# EAGLE board axiom_beta_interface_dummy_v0.7.1206e420 (EAGLE 7.0.0), part 1 of 2
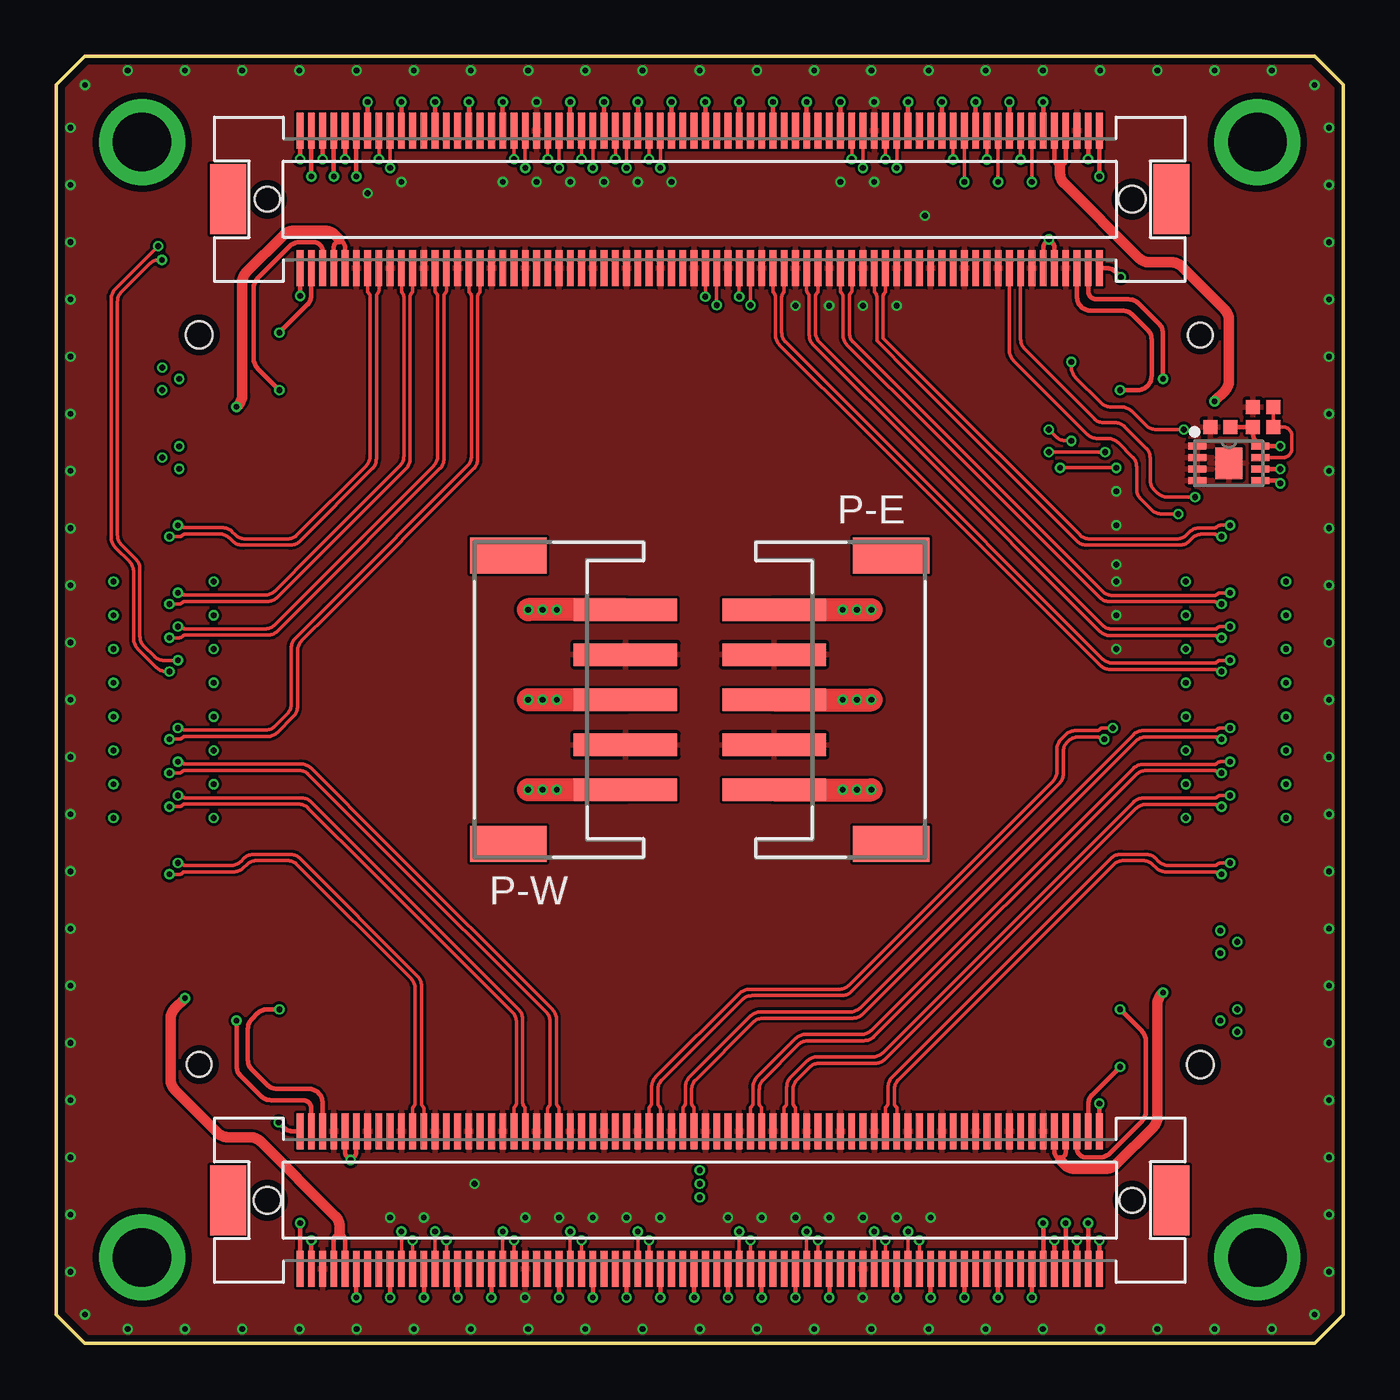
[diagram p0: board, top side]
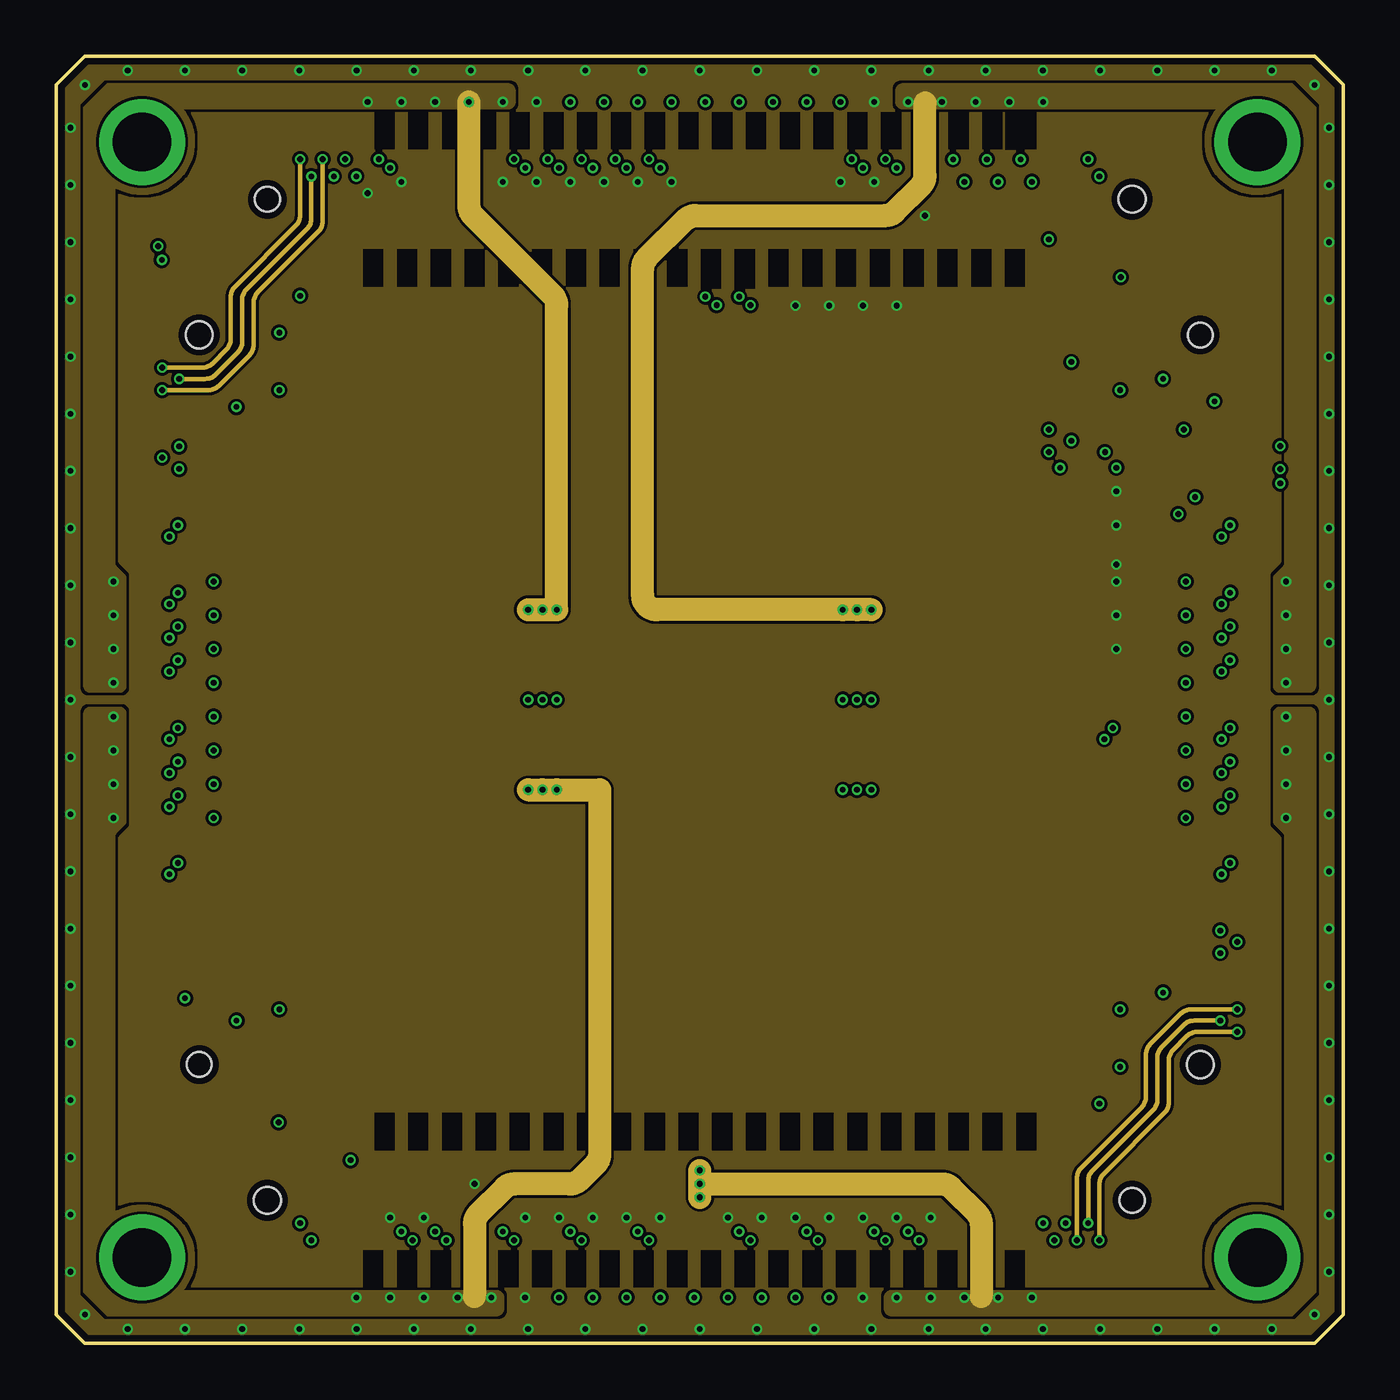
[diagram p1: board, inner layer Route2]
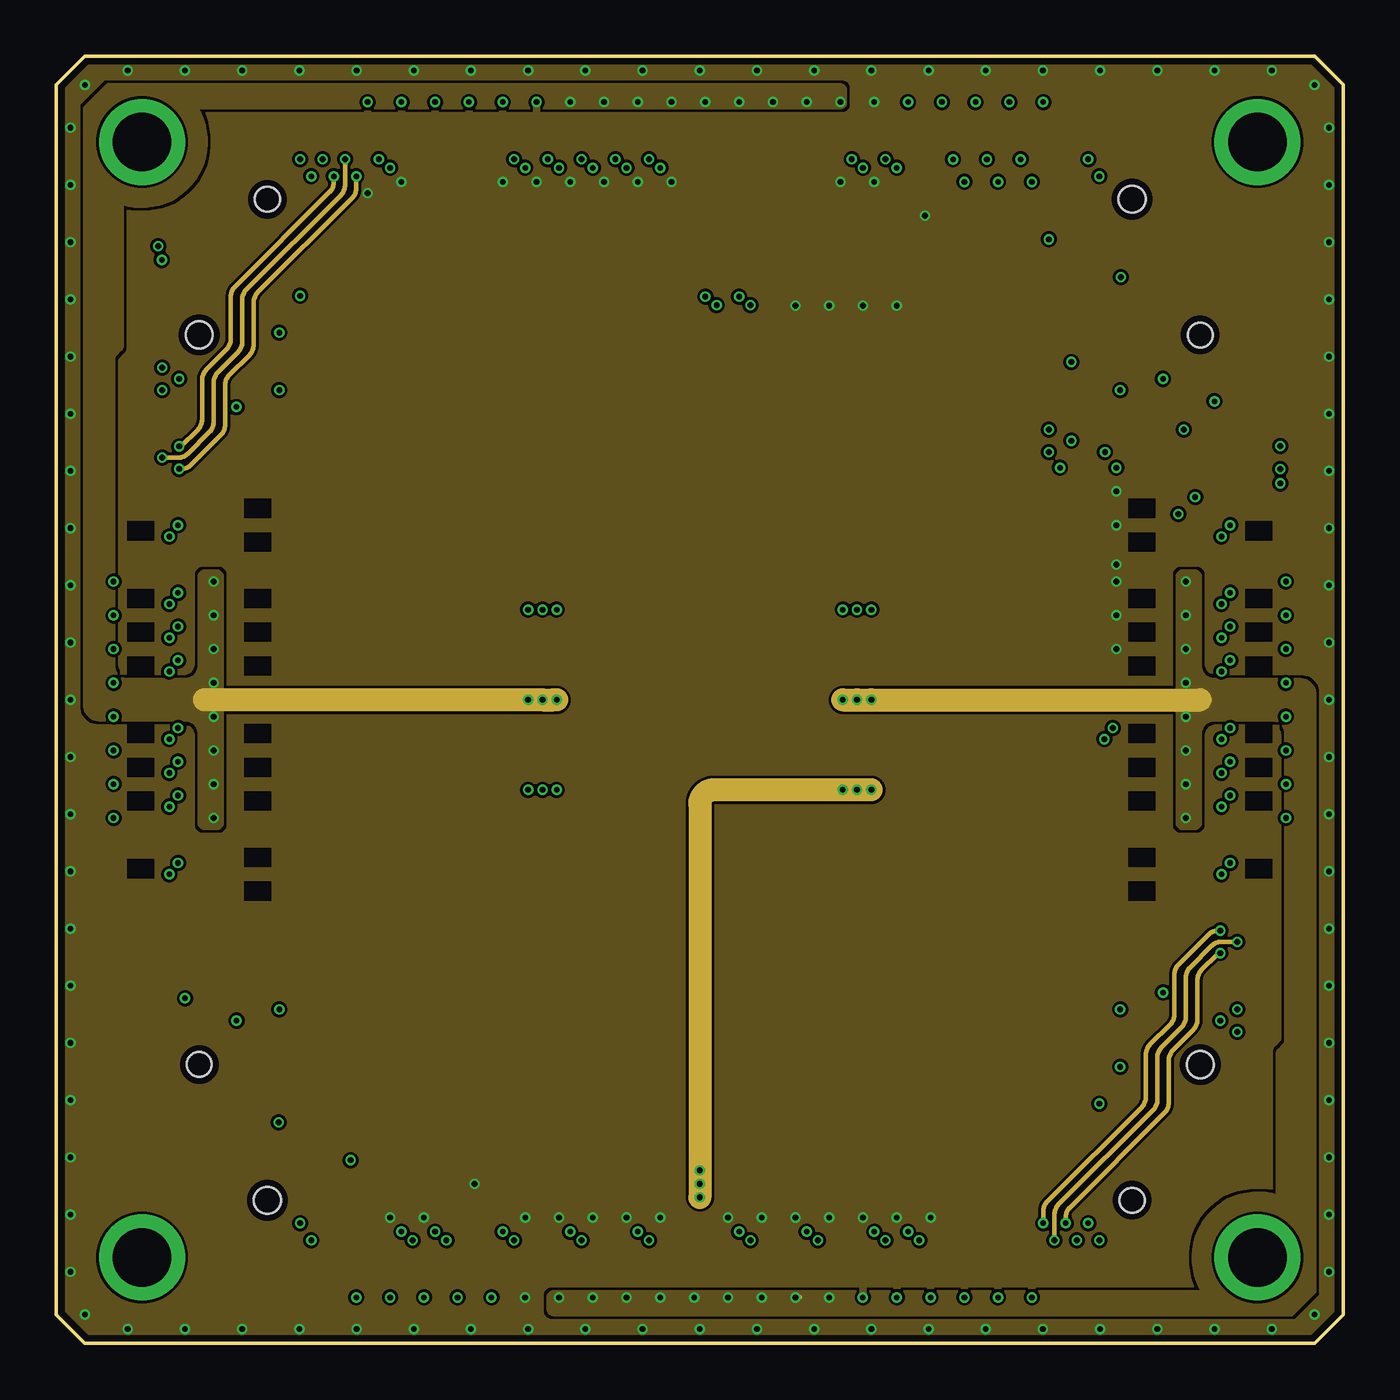
[diagram p2: board, inner layer Route15]
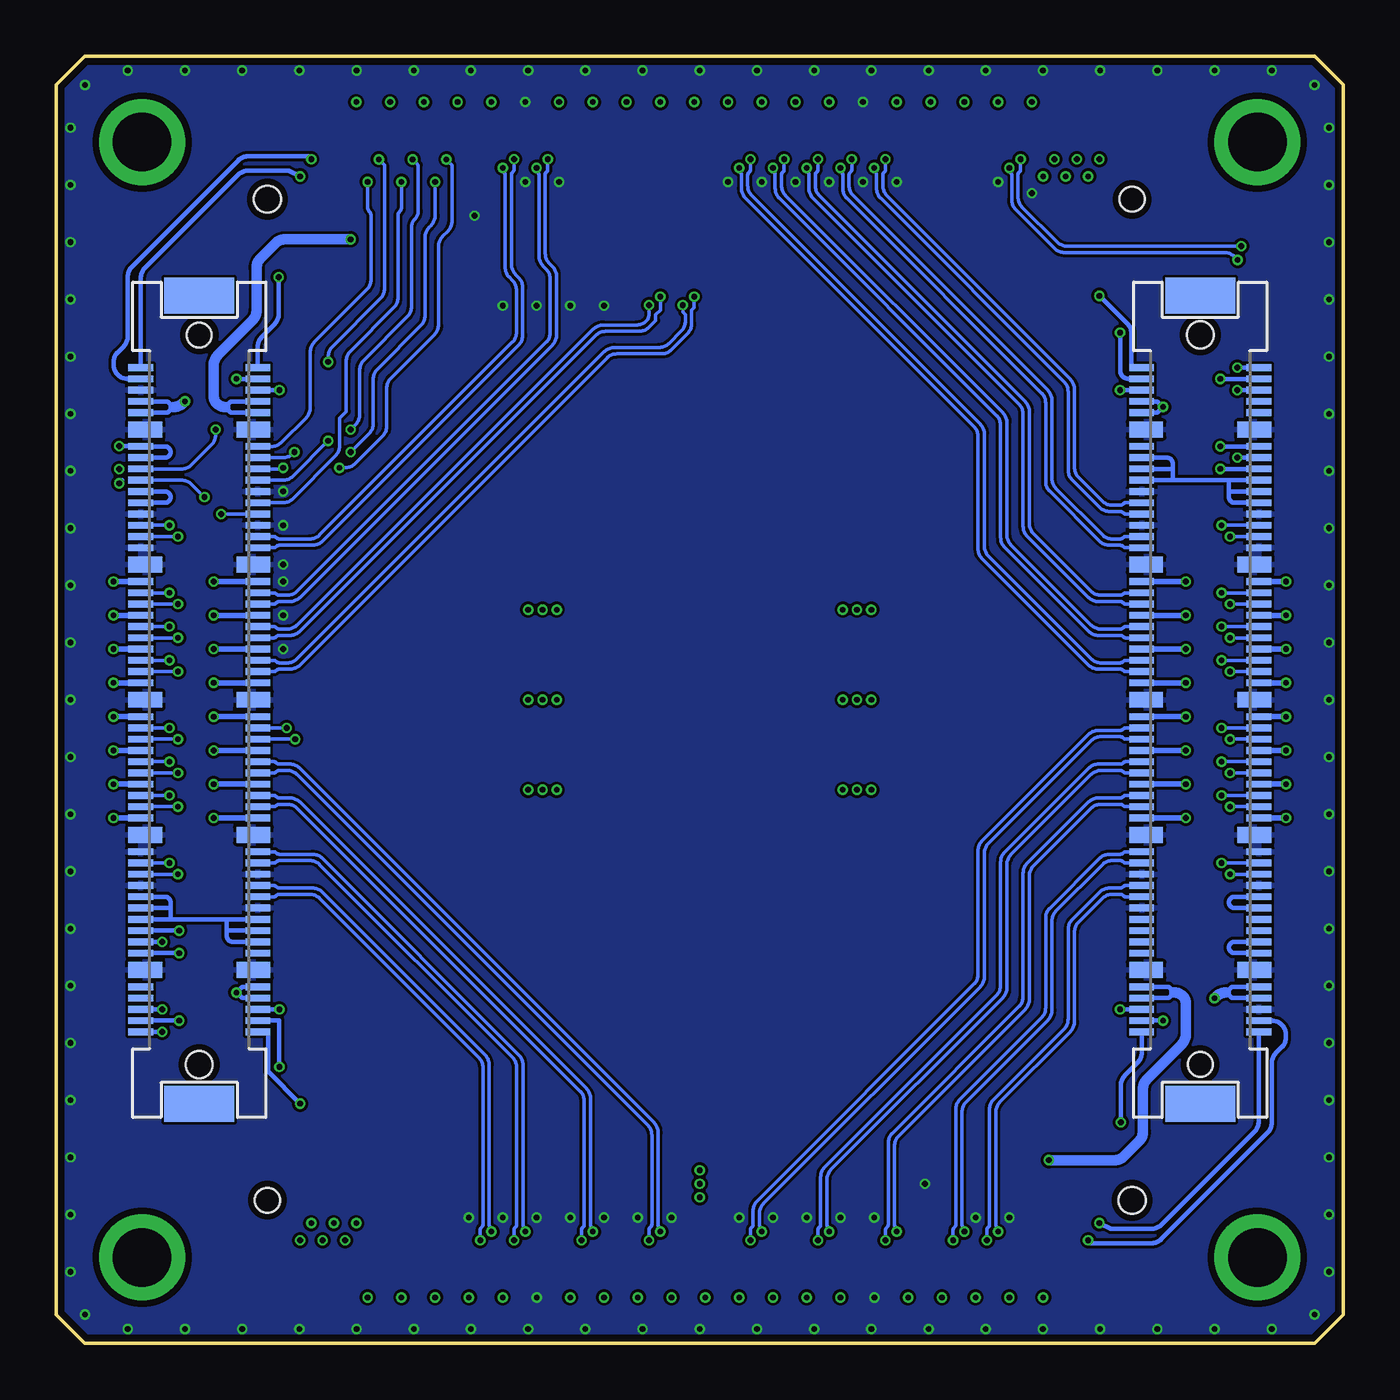
[diagram p3: board, bottom side, seen from below]

Size 57.15 x 57.15 mm. Coordinates in mm from the lower left corner, seen from the top.
Outline: 0,55.88 0,1.27 1.27,0 55.88,0 57.15,1.27 57.15,55.88 55.88,57.15 1.27,57.15 0,55.88
Copper layers (1*2*15*16): Top 0.035559375mm / dielectric 0.17018125mm / Route2 0.01778125mm / dielectric 47mil / Route15 0.01778125mm / dielectric 0.17018125mm / Bottom 0.035559375mm
Design rules "OSHPark-4layer-tuned *": minimum track width 5mil, minimum drill 10mil, track to track 5mil, track to pad 5mil, pad to pad 5mil, via to via 5mil, smd to smd 5mil, copper to edge 12mil, drill to drill 6mil, minimum pad ring 4mil, minimum via ring 4mil, stop-mask expansion 2mil, vias tented up to drill 15mil, thermal gap 6mil
Net classes: 0 default: width 0.152 mm, drill 0.254 mm; 1 power: width 0.152 mm, drill 0.254 mm
tRestrict: area 1.6,51.1 to 6,55.5; area 51.1,51.1 to 55.5,55.5; area 51.1,1.6 to 55.5,6; area 1.6,1.6 to 6,6
bRestrict: area 1.6,51.1 to 6,55.5; area 51.1,51.1 to 55.5,55.5; area 51.1,1.6 to 55.5,6; area 1.6,1.6 to 6,6

## Footprints (pad centres in the part's own frame; a part is rotated, then mirrored left to right if it is on the bottom)
0402-B = smd 0.62 x 0.62: 1 -0.45,0; 2 0.45,0
JST-PH-5-SMT-RA = smd 1 x 4.6: 1 -4,-2.7; 2 -2,-2.7; 3 0,-2.7; 4 2,-2.7; 5 4,-2.7 | smd 1.6 x 3.4: M1 -6.4,2.5; M2 6.4,2.5
DFN200X300X100-9N = smd 0.813 x 0.305: 1 -1.397,0.762; 2 -1.397,0.254; 3 -1.397,-0.254; 4 -1.397,-0.762; 5 1.397,-0.762; 6 1.397,-0.254; 7 1.397,0.254; 8 1.397,0.762 | smd 1.194 x 1.397: EP 0,0
FX10A-100P/10 = smd 0.3 x 1.1: 1 -14.75,-2.6; 2 -14.75,2.6; 3 -14.25,-2.6; 4 -14.25,2.6; 5 -13.75,-2.6; 6 -13.75,2.6; 7 -13.25,-2.6; 8 -13.25,2.6; 9 -12.75,-2.6; 10 -12.75,2.6; 11 -11.25,-2.6; 12 -11.25,2.6; 13 -10.75,-2.6; 14 -10.75,2.6; 15 -10.25,-2.6; 16 -10.25,2.6; 17 -9.75,-2.6; 18 -9.75,2.6; 19 -9.25,-2.6; 20 -9.25,2.6; 21 -8.75,-2.6; 22 -8.75,2.6; 23 -8.25,-2.6; 24 -8.25,2.6; 25 -7.75,-2.6; 26 -7.75,2.6; 27 -7.25,-2.6; 28 -7.25,2.6; 29 -6.75,-2.6; 30 -6.75,2.6; 31 -5.25,-2.6; 32 -5.25,2.6; 33 -4.75,-2.6; 34 -4.75,2.6; 35 -4.25,-2.6; 36 -4.25,2.6; 37 -3.75,-2.6; 38 -3.75,2.6; 39 -3.25,-2.6; 40 -3.25,2.6; 41 -2.75,-2.6; 42 -2.75,2.6; 43 -2.25,-2.6; 44 -2.25,2.6; 45 -1.75,-2.6; 46 -1.75,2.6; 47 -1.25,-2.6; 48 -1.25,2.6; 49 -0.75,-2.6; 50 -0.75,2.6; 51 0.75,-2.6; 52 0.75,2.6; 53 1.25,-2.6; 54 1.25,2.6; 55 1.75,-2.6; 56 1.75,2.6; 57 2.25,-2.6; 58 2.25,2.6; 59 2.75,-2.6; 60 2.75,2.6; 61 3.25,-2.6; 62 3.25,2.6; 63 3.75,-2.6; 64 3.75,2.6; 65 4.25,-2.6; 66 4.25,2.6; 67 4.75,-2.6; 68 4.75,2.6; 69 5.25,-2.6; 70 5.25,2.6; 71 6.75,-2.6; 72 6.75,2.6; 73 7.25,-2.6; 74 7.25,2.6; 75 7.75,-2.6; 76 7.75,2.6; 77 8.25,-2.6; 78 8.25,2.6; 79 8.75,-2.6; 80 8.75,2.6; 81 9.25,-2.6; 82 9.25,2.6; 83 9.75,-2.6; 84 9.75,2.6; 85 10.25,-2.6; 86 10.25,2.6; 87 10.75,-2.6; 88 10.75,2.6; 89 11.25,-2.6; 90 11.25,2.6; 91 12.75,-2.6; 92 12.75,2.6; 93 13.25,-2.6; 94 13.25,2.6; 95 13.75,-2.6; 96 13.75,2.6; 97 14.25,-2.6; 98 14.25,2.6; 99 14.75,-2.6; 100 14.75,2.6 | smd 0.7 x 1.5: G1 -12,-2.4; G2 -12,2.4; G3 -6,-2.4; G4 -6,2.4; G5 0,-2.4; G6 0,2.4; G7 6,-2.4; G8 6,2.4; G9 12,-2.4; G10 12,2.4 | smd 1.6 x 3.1: M1 -17.95,0; M2 17.95,0 | hole 1.1: -16.2,0 | hole 1.2: 16.2,0
FX10A-144S = smd 0.3 x 1.6: 1 -17.75,-3.05; 2 -17.75,3.05; 3 -17.25,-3.05; 4 -17.25,3.05; 5 -16.75,-3.05; 6 -16.75,3.05; 7 -16.25,-3.05; 8 -16.25,3.05; 9 -15.75,-3.05; 10 -15.75,3.05; 11 -15.25,-3.05; 12 -15.25,3.05; 13 -14.75,-3.05; 14 -14.75,3.05; 15 -14.25,-3.05; 16 -14.25,3.05; 17 -13.75,-3.05; 18 -13.75,3.05; 19 -13.25,-3.05; 20 -13.25,3.05; 21 -12.75,-3.05; 22 -12.75,3.05; 23 -12.25,-3.05; 24 -12.25,3.05; 25 -11.75,-3.05; 26 -11.75,3.05; 27 -11.25,-3.05; 28 -11.25,3.05; 29 -10.75,-3.05; 30 -10.75,3.05; 31 -10.25,-3.05; 32 -10.25,3.05; 33 -9.75,-3.05; 34 -9.75,3.05; 35 -9.25,-3.05; 36 -9.25,3.05; 37 -8.75,-3.05; 38 -8.75,3.05; 39 -8.25,-3.05; 40 -8.25,3.05; 41 -7.75,-3.05; 42 -7.75,3.05; 43 -7.25,-3.05; 44 -7.25,3.05; 45 -6.75,-3.05; 46 -6.75,3.05; 47 -6.25,-3.05; 48 -6.25,3.05; 49 -5.75,-3.05; 50 -5.75,3.05; 51 -5.25,-3.05; 52 -5.25,3.05; 53 -4.75,-3.05; 54 -4.75,3.05; 55 -4.25,-3.05; 56 -4.25,3.05; 57 -3.75,-3.05; 58 -3.75,3.05; 59 -3.25,-3.05; 60 -3.25,3.05; 61 -2.75,-3.05; 62 -2.75,3.05; 63 -2.25,-3.05; 64 -2.25,3.05; 65 -1.75,-3.05; 66 -1.75,3.05; 67 -1.25,-3.05; 68 -1.25,3.05; 69 -0.75,-3.05; 70 -0.75,3.05; 71 -0.25,-3.05; 72 -0.25,3.05; 73 0.25,-3.05; 74 0.25,3.05; 75 0.75,-3.05; 76 0.75,3.05; 77 1.25,-3.05; 78 1.25,3.05; 79 1.75,-3.05; 80 1.75,3.05; 81 2.25,-3.05; 82 2.25,3.05; 83 2.75,-3.05; 84 2.75,3.05; 85 3.25,-3.05; 86 3.25,3.05; 87 3.75,-3.05; 88 3.75,3.05; 89 4.25,-3.05; 90 4.25,3.05; 91 4.75,-3.05; 92 4.75,3.05; 93 5.25,-3.05; 94 5.25,3.05; 95 5.75,-3.05; 96 5.75,3.05; 97 6.25,-3.05; 98 6.25,3.05; 99 6.75,-3.05; 100 6.75,3.05; 101 7.25,-3.05; 102 7.25,3.05; 103 7.75,-3.05; 104 7.75,3.05; 105 8.25,-3.05; 106 8.25,3.05; 107 8.75,-3.05; 108 8.75,3.05; 109 9.25,-3.05; 110 9.25,3.05; 111 9.75,-3.05; 112 9.75,3.05; 113 10.25,-3.05; 114 10.25,3.05; 115 10.75,-3.05; 116 10.75,3.05; 117 11.25,-3.05; 118 11.25,3.05; 119 11.75,-3.05; 120 11.75,3.05; 121 12.25,-3.05; 122 12.25,3.05; 123 12.75,-3.05; 124 12.75,3.05; 125 13.25,-3.05; 126 13.25,3.05; 127 13.75,-3.05; 128 13.75,3.05; 129 14.25,-3.05; 130 14.25,3.05; 131 14.75,-3.05; 132 14.75,3.05; 133 15.25,-3.05; 134 15.25,3.05; 135 15.75,-3.05; 136 15.75,3.05; 137 16.25,-3.05; 138 16.25,3.05; 139 16.75,-3.05; 140 16.75,3.05; 141 17.25,-3.05; 142 17.25,3.05; 143 17.75,-3.05; 144 17.75,3.05 | smd 1.6 x 3.1: M1 -20.95,0; M2 20.95,0 | hole 1.1: -19.2,0 | hole 1.2: 19.2,0

## Placement (x,y rotation side)
C1  [0402-B]  51.69,40.69 180 top
P-E  JST_5PIN  [JST-PH-5-SMT-RA]  34.58,28.57 270 top
P-W  JST_5PIN  [JST-PH-5-SMT-RA]  22.57,28.57 90 top
PARALLELLA  [PARALLELLA-FRAME]  28.57,28.57 0 top
R1  [0402-B]  53.59,40.69 0 top
R2  [0402-B]  53.59,41.58 180 top
U1  BR24G04NUX  [DFN200X300X100-9N]  52.07,39.08 0 top
U$1  [µZ-FRAME]  28.57,28.57 0 top
X-EAST  FX10-100/10P  [FX10A-100P/10]  50.8,28.57 270 bottom
X-NORTH  FX10-144S  [FX10A-144S]  28.57,50.8 0 top
X-SOUTH  FX10-144S  [FX10A-144S]  28.57,6.35 180 top
X-WEST  FX10-100/10P  [FX10A-100P/10]  6.35,28.57 90 bottom

## Library data of the parts
C1 R1 R2 = generic-rcl
P-E P-W = jst-ph
PARALLELLA = parallella
U1 = eeprom
U$1 = microzed
X-EAST X-NORTH X-SOUTH X-WEST = fx10

## Nets
CLK_IN: X-EAST.24 X-NORTH.127
E_I2C_V: C1.1 R1.1 U1.8 X-EAST.11 X-EAST.13
E_SCL: U1.6
E_SDA: U1.5
E_SDI_V: X-EAST.19 X-EAST.21
E_VE: X-EAST.79 X-EAST.81 X-EAST.83 X-EAST.84 X-EAST.86 X-EAST.88
E_VE_CV: X-EAST.90
E_VE_OV: X-EAST.93
E_VE_UV: X-EAST.91
FRAME_REQ: X-EAST.15 X-NORTH.130
GND [power]: C1.2 P-E.2 P-E.4 P-W.2 P-W.4 R2.2 U1.1 U1.2 U1.3 U1.4 U1.EP X-EAST.5 X-EAST.20 X-EAST.23 X-EAST.26 X-EAST.29 X-EAST.71 X-EAST.76 X-EAST.77 X-EAST.82 X-EAST.G1 X-EAST.G2 X-EAST.G3 X-EAST.G4 X-EAST.G5 X-EAST.G6 X-EAST.G7 X-EAST.G8 X-EAST.G9 X-EAST.G10 X-NORTH.11 X-NORTH.17 X-NORTH.23 X-NORTH.29 X-NORTH.35 X-NORTH.41 X-NORTH.44 X-NORTH.47 X-NORTH.53 X-NORTH.59 X-NORTH.65 X-NORTH.71 X-NORTH.77 X-NORTH.83 X-NORTH.89 X-NORTH.95 X-NORTH.101 X-NORTH.104 X-NORTH.107 X-NORTH.113 X-NORTH.119 X-NORTH.125 X-NORTH.131 X-NORTH.137 X-NORTH.140 X-SOUTH.11 X-SOUTH.17 X-SOUTH.23 X-SOUTH.29 X-SOUTH.35 X-SOUTH.41 X-SOUTH.44 X-SOUTH.47 X-SOUTH.53 X-SOUTH.59 X-SOUTH.65 X-SOUTH.71 X-SOUTH.77 X-SOUTH.83 X-SOUTH.89 X-SOUTH.95 X-SOUTH.101 X-SOUTH.104 X-SOUTH.107 X-SOUTH.113 X-SOUTH.119 X-SOUTH.125 X-SOUTH.131 X-SOUTH.137 X-SOUTH.140 X-WEST.5 X-WEST.20 X-WEST.23 X-WEST.26 X-WEST.29 X-WEST.71 X-WEST.76 X-WEST.77 X-WEST.82 X-WEST.G1 X-WEST.G2 X-WEST.G3 X-WEST.G4 X-WEST.G5 X-WEST.G6 X-WEST.G7 X-WEST.G8 X-WEST.G9 X-WEST.G10
JTAG_V: X-WEST.19 X-WEST.21
LVDS_CLK_N: X-NORTH.13 X-WEST.75
LVDS_CLK_P: X-NORTH.15 X-WEST.73
N03_N: X-NORTH.24
N03_P: X-NORTH.22
N36_N: X-NORTH.123
N36_P: X-NORTH.121
N$12: R1.2 R2.1 U1.7
N_CHK_V: X-NORTH.7 X-NORTH.9 X-WEST.92 X-WEST.94
N_I2C_V: X-EAST.7 X-EAST.9 X-NORTH.136 X-NORTH.138
N_SCK: X-EAST.2 X-NORTH.143
N_SCL: X-EAST.1 X-NORTH.144
N_SDA: X-EAST.3 X-NORTH.142
N_SDI: X-EAST.6 X-NORTH.139
N_SDO: X-EAST.4 X-NORTH.141
N_SPI_V: X-EAST.8 X-EAST.10 X-NORTH.133 X-NORTH.135
N_VE [power]: P-E.1 X-EAST.31 X-EAST.37 X-EAST.43 X-EAST.49 X-NORTH.110 X-NORTH.116 X-NORTH.122 X-NORTH.128 X-NORTH.134
N_VE_CV: X-NORTH.5 X-WEST.96
N_VE_OV: X-NORTH.6 X-WEST.95
N_VE_UV: X-NORTH.12 X-WEST.85
N_VN [power]: P-W.3 X-NORTH.50 X-NORTH.56 X-NORTH.62 X-NORTH.68 X-NORTH.74 X-NORTH.80 X-NORTH.86 X-NORTH.92 X-NORTH.98 X-WEST.32 X-WEST.38 X-WEST.44 X-WEST.50 X-WEST.52 X-WEST.58 X-WEST.64 X-WEST.70
N_VN_CV: X-NORTH.3 X-WEST.98
N_VN_OV: X-NORTH.4 X-WEST.97
N_VN_UV: X-NORTH.10 X-WEST.87
N_VW [power]: P-W.5 X-NORTH.14 X-NORTH.20 X-NORTH.26 X-NORTH.32 X-NORTH.38 X-WEST.51 X-WEST.57 X-WEST.63 X-WEST.69
N_VW_CV: X-NORTH.1 X-WEST.100
N_VW_OV: X-NORTH.2 X-WEST.99
N_VW_UV: X-NORTH.8 X-WEST.89
OUT1_N: X-SOUTH.120 X-WEST.28
OUT1_P: X-SOUTH.118 X-WEST.30
OUT2_N: X-SOUTH.114
OUT2_P: X-SOUTH.112
OUT3_N: X-SOUTH.123 X-WEST.25
OUT3_P: X-SOUTH.121 X-WEST.27
OUT4_N: X-SOUTH.117
OUT4_P: X-SOUTH.115
OUT5_N: X-SOUTH.108 X-WEST.34
OUT5_P: X-SOUTH.106 X-WEST.36
OUT6_N: X-SOUTH.111
OUT6_P: X-SOUTH.109
OUT7_N: X-SOUTH.105 X-WEST.33
OUT7_P: X-SOUTH.103 X-WEST.35
OUT8_N: X-SOUTH.102
OUT8_P: X-SOUTH.100
OUT9_N: X-SOUTH.96 X-WEST.40
OUT9_P: X-SOUTH.94 X-WEST.42
OUT10_N: X-SOUTH.93
OUT10_P: X-SOUTH.91
OUT11_N: X-SOUTH.99 X-WEST.39
OUT11_P: X-SOUTH.97 X-WEST.41
OUT12_N: X-SOUTH.90
OUT12_P: X-SOUTH.88
OUT13_N: X-SOUTH.84 X-WEST.46
OUT13_P: X-SOUTH.82 X-WEST.48
OUT14_N: X-SOUTH.87
OUT14_P: X-SOUTH.85
OUT15_N: X-EAST.54 X-SOUTH.81
OUT15_P: X-EAST.56 X-SOUTH.79
OUT16_N: X-SOUTH.78
OUT16_P: X-SOUTH.76
OUT17_N: X-EAST.53 X-SOUTH.75
OUT17_P: X-EAST.55 X-SOUTH.73
OUT18_N: X-SOUTH.72
OUT18_P: X-SOUTH.70
OUT19_N: X-EAST.60 X-SOUTH.66
OUT19_P: X-EAST.62 X-SOUTH.64
OUT20_N: X-SOUTH.69
OUT20_P: X-SOUTH.67
OUT21_N: X-EAST.59 X-SOUTH.63
OUT21_P: X-EAST.61 X-SOUTH.61
OUT22_N: X-SOUTH.60
OUT22_P: X-SOUTH.58
OUT23_N: X-EAST.66 X-SOUTH.54
OUT23_P: X-EAST.68 X-SOUTH.52
OUT24_N: X-SOUTH.51
OUT24_P: X-SOUTH.49
OUT25_N: X-EAST.65 X-SOUTH.57
OUT25_P: X-EAST.67 X-SOUTH.55
OUT26_N: X-SOUTH.48
OUT26_P: X-SOUTH.46
OUT27_N: X-EAST.73 X-SOUTH.39
OUT27_P: X-EAST.75 X-SOUTH.37
OUT28_N: X-SOUTH.45
OUT28_P: X-SOUTH.43
OUT29_N: X-EAST.72 X-SOUTH.42
OUT29_P: X-EAST.74 X-SOUTH.40
OUT30_N: X-SOUTH.33
OUT30_P: X-SOUTH.31
OUT31_N: X-EAST.78 X-SOUTH.36
OUT31_P: X-EAST.80 X-SOUTH.34
OUT32_N: X-SOUTH.27
OUT32_P: X-SOUTH.25
OUT33_N: X-NORTH.19 X-WEST.67
OUT33_P: X-NORTH.21 X-WEST.65
OUT34_N: X-NORTH.28
OUT34_P: X-NORTH.30
OUT35_N: X-NORTH.25 X-WEST.61
OUT35_P: X-NORTH.27 X-WEST.59
OUT36_N: X-NORTH.34
OUT36_P: X-NORTH.36
OUT37_N: X-NORTH.31 X-WEST.47
OUT37_P: X-NORTH.33 X-WEST.45
OUT38_N: X-NORTH.37
OUT38_P: X-NORTH.39
OUT39_N: X-NORTH.40 X-WEST.80
OUT39_P: X-NORTH.42 X-WEST.78
OUT40_N: X-NORTH.43
OUT40_P: X-NORTH.45
OUT41_N: X-NORTH.46 X-WEST.74
OUT41_P: X-NORTH.48 X-WEST.72
OUT42_N: X-NORTH.49
OUT42_P: X-NORTH.51
OUT43_N: X-NORTH.52 X-WEST.68
OUT43_P: X-NORTH.54 X-WEST.66
OUT44_N: X-NORTH.55
OUT44_P: X-NORTH.57
OUT45_N: X-NORTH.58 X-WEST.62
OUT45_P: X-NORTH.60 X-WEST.60
OUT46_N: X-NORTH.61
OUT46_P: X-NORTH.63
OUT47_N: X-NORTH.64 X-WEST.56
OUT47_P: X-NORTH.66 X-WEST.54
OUT48_N: X-NORTH.67
OUT48_P: X-NORTH.69
OUT49_N: X-EAST.48 X-NORTH.73
OUT49_P: X-EAST.46 X-NORTH.75
OUT50_N: X-NORTH.70
OUT50_P: X-NORTH.72
OUT51_N: X-EAST.42 X-NORTH.79
OUT51_P: X-EAST.40 X-NORTH.81
OUT52_N: X-NORTH.76
OUT52_P: X-NORTH.78
OUT53_N: X-EAST.47 X-NORTH.85
OUT53_P: X-EAST.45 X-NORTH.87
OUT54_N: X-NORTH.82
OUT54_P: X-NORTH.84
OUT55_N: X-EAST.41 X-NORTH.91
OUT55_P: X-EAST.39 X-NORTH.93
OUT56_N: X-NORTH.88
OUT56_P: X-NORTH.90
OUT57_N: X-EAST.35 X-NORTH.97
OUT57_P: X-EAST.33 X-NORTH.99
OUT58_N: X-NORTH.94
OUT58_P: X-NORTH.96
OUT59_N: X-EAST.27 X-NORTH.103
OUT59_P: X-EAST.25 X-NORTH.105
OUT60_N: X-NORTH.109
OUT60_P: X-NORTH.111
OUT61_N: X-EAST.36 X-NORTH.100
OUT61_P: X-EAST.34 X-NORTH.102
OUT62_N: X-NORTH.115
OUT62_P: X-NORTH.117
OUT63_N: X-EAST.30 X-NORTH.106
OUT63_P: X-EAST.28 X-NORTH.108
OUT64_N: X-NORTH.112
OUT64_P: X-NORTH.114
OUTCLK_N: X-NORTH.16 X-WEST.53
OUTCLK_P: X-NORTH.18 X-WEST.55
OUTCTR_N: X-SOUTH.126 X-WEST.22
OUTCTR_P: X-SOUTH.124 X-WEST.24
S00_N: X-SOUTH.15
S00_P: X-SOUTH.13
S01_N: X-SOUTH.18
S01_P: X-SOUTH.16
S02_N: X-SOUTH.21
S02_P: X-SOUTH.19
S03_N: X-SOUTH.24
S03_P: X-SOUTH.22
S05_N: X-SOUTH.30
S05_P: X-SOUTH.28
S38_N: X-SOUTH.129
S38_P: X-SOUTH.127
S39_N: X-SOUTH.132
S39_P: X-SOUTH.130
S_CHK_V: X-EAST.92 X-EAST.94 X-SOUTH.7 X-SOUTH.9
S_I2C_V: X-SOUTH.136 X-SOUTH.138 X-WEST.7 X-WEST.9
S_SCK: X-SOUTH.143 X-WEST.2
S_SCL: X-SOUTH.144 X-WEST.1
S_SDA: X-SOUTH.142 X-WEST.3
S_SDI: X-SOUTH.139 X-WEST.6
S_SDO: X-SOUTH.141 X-WEST.4
S_SPI_V: X-SOUTH.133 X-SOUTH.135 X-WEST.8 X-WEST.10
S_VE [power]: P-E.5 X-EAST.51 X-EAST.57 X-EAST.63 X-EAST.69 X-SOUTH.14 X-SOUTH.20 X-SOUTH.26 X-SOUTH.32 X-SOUTH.38
S_VE_CV: X-EAST.100 X-SOUTH.1
S_VE_OV: X-EAST.99 X-SOUTH.2
S_VE_UV: X-EAST.89 X-SOUTH.8
S_VS [power]: P-E.3 X-EAST.32 X-EAST.38 X-EAST.44 X-EAST.50 X-EAST.52 X-EAST.58 X-EAST.64 X-EAST.70 X-SOUTH.50 X-SOUTH.56 X-SOUTH.62 X-SOUTH.68 X-SOUTH.74 X-SOUTH.80 X-SOUTH.86 X-SOUTH.92 X-SOUTH.98
S_VS_CV: X-EAST.98 X-SOUTH.3
S_VS_OV: X-EAST.97 X-SOUTH.4
S_VS_UV: X-EAST.87 X-SOUTH.10
S_VW [power]: P-W.1 X-SOUTH.110 X-SOUTH.116 X-SOUTH.122 X-SOUTH.128 X-SOUTH.134 X-WEST.31 X-WEST.37 X-WEST.43 X-WEST.49
S_VW_CV: X-EAST.96 X-SOUTH.5
S_VW_OV: X-EAST.95 X-SOUTH.6
S_VW_UV: X-EAST.85 X-SOUTH.12
SPI_EN: X-EAST.14 X-NORTH.120
SYS_RES_N: X-EAST.22 X-NORTH.126
T_EXP1: X-EAST.12 X-NORTH.132
T_EXP2: X-EAST.16 X-NORTH.118
TCK: X-WEST.12
TDI: X-WEST.16
TDIG1: X-EAST.18 X-NORTH.124
TDIG2: X-EAST.17 X-NORTH.129
TDO: X-WEST.18
TMS: X-WEST.14
W_I2C_V: X-WEST.11 X-WEST.13
W_SCL: X-WEST.15
W_SDA: X-WEST.17
W_VW: X-WEST.79 X-WEST.81 X-WEST.83 X-WEST.84 X-WEST.86 X-WEST.88
W_VW_CV: X-WEST.90
W_VW_OV: X-WEST.93
W_VW_UV: X-WEST.91